# Altium PCB main_board.PcbDoc
Units mm, origin at the board's own origin, x right, y up, seen from the top; angles counter-clockwise.
Board outline 136.77 x 56.39 mm, 2 copper layers (Top Layer, Bottom Layer); 102 components, 85 nets, 405 pads, 40 vias.
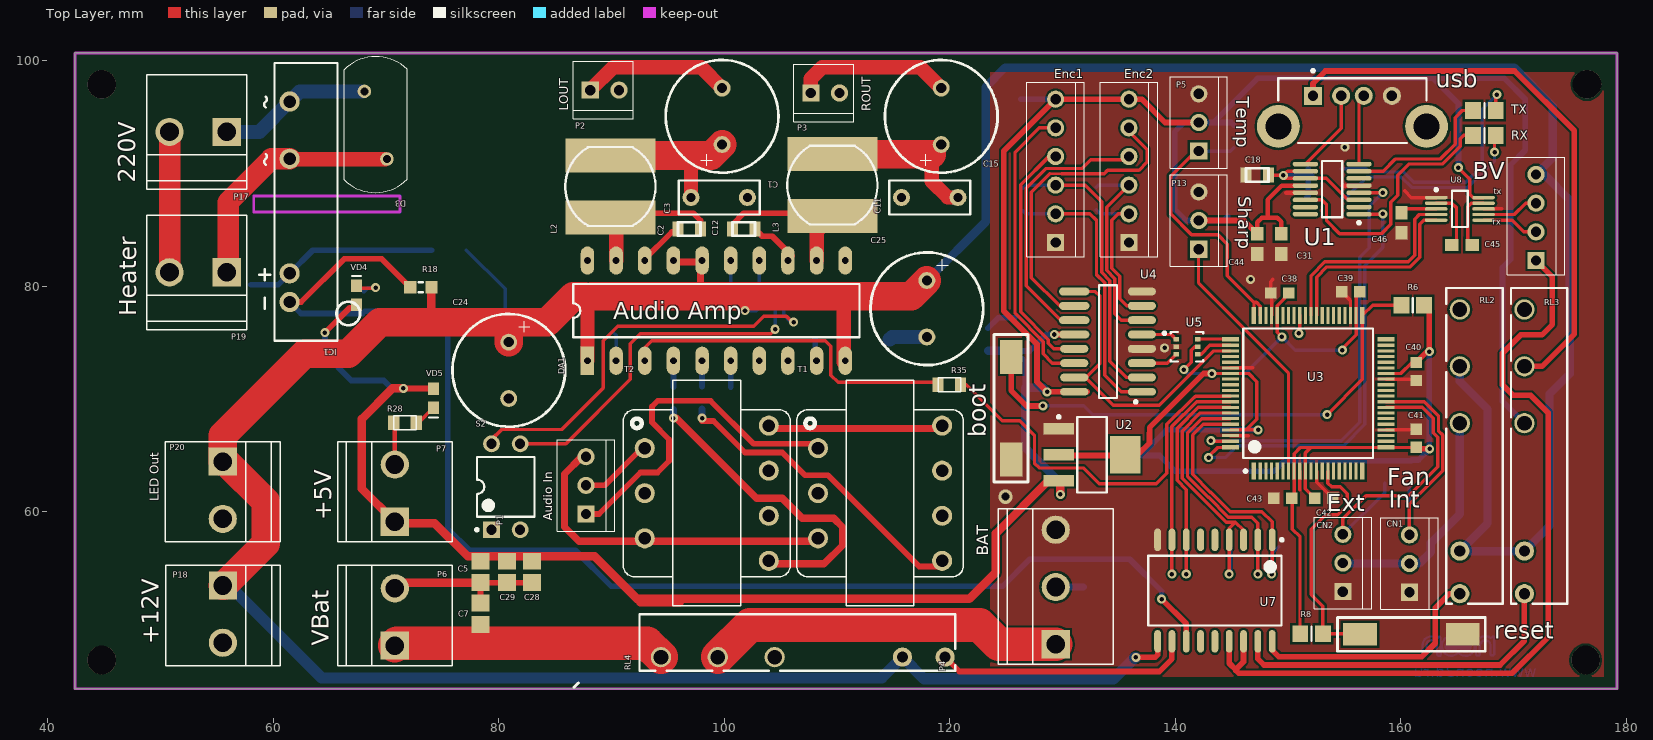
[diagram p0: Top Layer view]
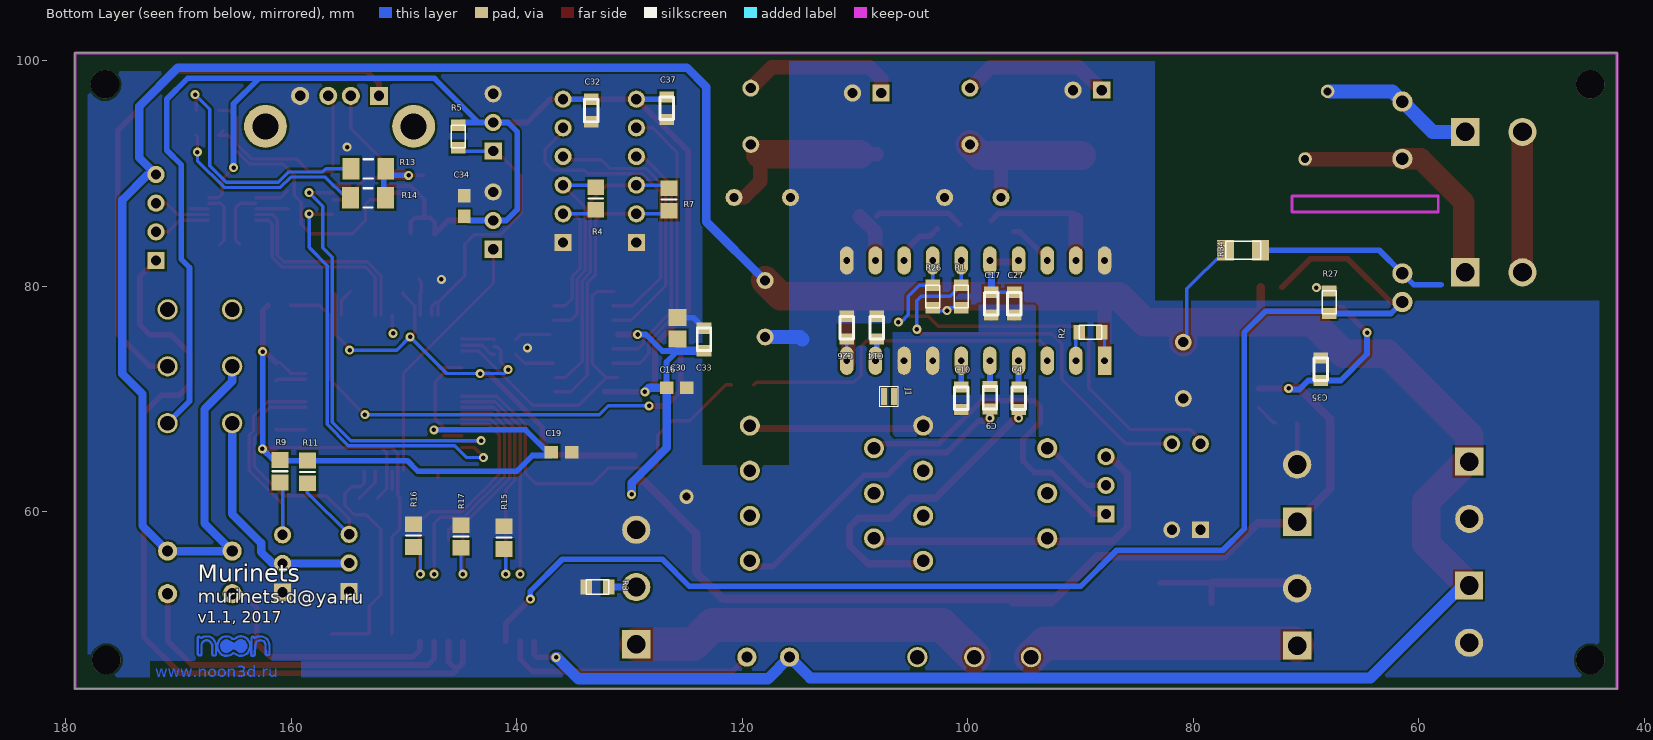
[diagram p1: Bottom Layer view, seen from below]

## Layer stack, top to bottom
Top Solder: solder mask 0.0102, Solder Resist, Dk 3.5
Top Layer: signal copper 0.0356
Dielectric 1: dielectric 0.32, FR-4, Dk 4.8
Bottom Layer: signal copper 0.0356
Bottom Solder: solder mask 0.0102, Solder Resist, Dk 3.5

## Board outline
42.425,44.323 42.425,100.711 179.197,100.711 179.197,44.323

## Design rules (kind name [scope] priority, off if disabled: settings)
Clearance Clearance_polygon [InPolygon] p1: gap=0.2 ignorepadtopadclearanceinfootprint=FALSE
Clearance [All] p2: gap=0.15 ignorepadtopadclearanceinfootprint=FALSE
PolygonConnect [IsPad And InNet('GND')] p1: connectstyle=Direct reliefconductorwidth=0.508 reliefentries=4 polygonreliefangle="90 Angle" airgapwidth=0.381
PolygonConnect ViaCon [IsVia And InNet('GND')] p2: connectstyle=Direct reliefconductorwidth=0.508 reliefentries=4 polygonreliefangle="90 Angle" airgapwidth=0.381
RoutingVias [All] p1: holewidth=0.6 width=1.15 viastyle="Through Hole" minholewidth=0.6 minwidth=1.15 maxholewidth=0.8 maxwidth=1.3 useviatemplates=TRUE viatemplateguid#1={5399A165-F482-44B8-8C10-10F574C55520} viatemplatename#1=v08h40
SolderMaskExpansion [All] p1: expansion=0.102
Width [All] p1: maxlimit=5.81 minlimit=0.2 preferedwidth=0.305 minimp=50.000000 maximp=50.000000 favimp=50.000000
30 further rules are at their usual default settings.

## Components (designator, comment, footprint, x,y, rotation, side; value= is the part's Value field where it differs from the comment)
boot "chip button" "BUTTON SMD" 125.45,67.65 r90 top
BV "wf-4" WF-4 172,82.3 r90 top
C1 "470. x 25V" CAP+_D10_dip 99.822,92.583 r180 top
C2 "0,22" Cap_0805 97.917,85.09 r180 top
C3 "0.68" CAPR500-300X720X650 99.568,87.884 r180 top
C4 "1u" Cap_0805 95.504,69.088 r90 bottom
C5 "10 мк" CAPC2012M 78.4,54.675 r270 top
C7 "10 мк" CAPC2012M 78.4,50.975 r90 top
C9 "1u" Cap_0805 98.044,71.12 r270 bottom
C10 "1u" Cap_0805 100.584,69.088 r90 bottom
C11 "0.68" CAPR500-300X720X650 118.237,87.884 r180 top
C12 "0,22" Cap_0805 102.743,85.09 r180 top
C14 "1u" Cap_0805 108.077,77.343 r270 bottom
C15 "470. x 25V" CAP+_D10_dip 119.253,92.583 r180 top
C16 "Cap" CAPC1608M 125.825,71 r180 bottom value=1uF
C17 "0.1" Cap_0805 97.917,77.47 r90 bottom
C18 "0.1" Cap_0805 148.275,89.875 r180 top
C19 "Cap" CAPC1608M 136.05,65.275 r180 bottom value=1uF
C24 "470. x 25V" CAP+_D10_dip 80.899,75.057 r0 top
C25 "470. x 25V" CAP+_D10_dip 117.983,80.518 r0 top
C26 "0.1" Cap_0805 110.744,77.343 r270 bottom
C27 "2.2" Cap_0805 95.885,77.47 r90 bottom
C28 "0.1" CAPC2012M 82.95,54.675 r90 top
C29 "0.1" CAPC2012M 80.75,54.675 r90 top
C30 "0.1" CAPC2012M 125.75,76.275 r270 bottom
C31 "0.1" CAPC1608M 149.425,83.775 r90 top
C32 "0.1" Cap_0805 133.4,94.6 r90 bottom
C33 "0.1" Cap_0805 123.4,76.3 r270 bottom
C34 "Cap" CAPC1608M 144.675,87.125 r90 bottom value=1uF
C35 "0.1" Cap_0805 68.707,73.66 r270 bottom
C37 "0.1" Cap_0805 126.7,94.8 r90 bottom
C38 "p" CAPC1608N 149.275,79.425 r0 top value=100nF
C39 "p" CAPC1608N 155.575,79.525 r0 top value=100nF
C40 "p" CAPC1608N 161.375,72.45 r90 top value=100nF
C41 "p" CAPC1608N 161.375,66.525 r270 top value=100nF
C42 "p" CAPC1608N 153.175,61.225 r180 top value=100nF
C43 "p" CAPC1608N 149.55,61.225 r0 top value=100nF
C44 "0.1" CAPC1608M 147.275,83.775 r90 top
C45 "0.1" CAPC1608M 165.45,83.675 r180 top
C46 "p" CAPC1608M 160.075,85.65 r270 top value=100nF
CN1 "3-pin" wf-3 160.775,52.885 r90 top
CN2 "3-pin" wf-3 154.875,52.935 r90 top
D3 "390V" Var_130 68.1,97.3 r270 top
DA1 "TPA3122D2" DIP20 87.884,73.406 r90 top
Enc1 "6-pin" WF-6 129.4,83.9 r90 top (schematic designator enc1)
Enc2 "6-pin" WF-6 135.9,83.9 r90 top (schematic designator enc2)
IC1 "S202T" CRYDOM_LC 61.468,87.503 r270 top
J1 "JMPSMD" JMPSMD 106.553,70.231 r270 bottom
L2 "22 мкГн" SDR0805 89.916,86.106 r90 top
L3 "22 мкГн" SDR0805 109.601,86.233 r90 top
P1 "WF-3" WF-3 87.757,59.817 r90 top
P2 "WF2" WF-2 88.138,97.409 r0 top
P3 "WF2" WF-2 107.696,97.155 r0 top
P4 "MPW3" "MPW-3 - duplicate" 129.413,48.26 r90 top
P5 "WF-3" WF-3 142.1,92 r90 top
P6 "MPW-2" MPW-2 70.8,48.145 r90 top
P7 "MPW-2" MPW-2 70.8,59.125 r90 top
P13 "WF-3" WF-3 142.1,83.3 r90 top
P17 "MPW-2" MPW-2 55.9,93.7 r180 top
P18 "MPW-2" MPW-2 55.55,53.479 r270 top
P19 "MPW-2" MPW-2 55.9,81.25 r180 top
P20 "MPW-2" MPW-2 55.538,64.459 r270 top
R1 "10k" Res_0805 100.584,78.105 r90 bottom
R2 "10k" Res_0805 88.138,75.946 r0 bottom
R3 "2k4" Res_0805 133.858,53.34 r180 bottom
R4 "100" RESC2012M 133,87.8 r90 bottom
R5 "10k" Res_0805 145.2,92.3 r90 bottom
R6 "510" RESC2012M 161.075,78.325 r0 top
R7 "100" RESC2012M 126.5,87.7 r90 bottom
R8 "510" RESC2012M 152.1,49.2 r180 top
R9 "100" RESC2012M 161,63.6 r90 bottom
R11 "100" RESC2012M 158.575,63.55 r90 bottom
R13 "Res2" RESC3216M 153.175,90.425 r0 bottom value=1K
R14 "Res2" RESC3216M 153.2,87.85 r0 bottom value=1K
R15 "10k" RESC2012M 141.15,57.725 r90 bottom
R16 "10k" RESC2012M 149.175,57.9 r90 bottom
R17 "10k" RESC2012M 144.95,57.825 r90 bottom
R18 "4.7K" RESC1608M 73.1,79.925 r0 top
R26 "10k" Res_0805 103.124,78.105 r90 bottom
R27 "510" Res_0805 67.945,77.597 r90 bottom
R28 "510" Res_0805 70.7,67.9 r0 top
R34 "510" Res_1206 74.05,83.2 r0 bottom
R35 "10k" Res_0805 120.975,71.275 r180 top
reset "chip button" "BUTTON SMD" 162.5,49.15 r180 top
RL2 "5VDC" REL_TYCO-SCHRACK_SNR 165.25,65.85 r90 top
RL3 "5VDC" REL_TYCO-SCHRACK_SNR 170.975,65.85 r90 top
RL4 "5VDC" REL_TYCO-SCHRACK_SNR 106.5,47.125 r180 top
RX "led" RESC2012M 167.425,93.4 r0 top
S2 "SW DIP-2" DIP-4 80.645,62.23 r90 top
T1 "TO-31" L2008-2014 108.331,65.659 r0 top
T2 "TO-31" L2008-2014 92.964,65.659 r0 top
TX "led" RESC2012M 167.425,95.6 r0 top
U1 "FT230X" SOP635P600-16N 153.925,88.625 r180 top
U2 "ADP3338" SOT223-4M 132.625,65.075 r0 top
U3 "LPC1758FBD80" SOT315-1_V 151.8,70.525 r90 top
U4 "SN65C1167" "SOIC127P600-16M - INCREASE WIDTH" 134.05,75.1 r180 top
U5 "NC7SZ157P6X" PSON65P220X250X80-7V 141.05,74.65 r0 top
U7 "ULN2803A" SOIC127P1030-18L 143.525,53.025 r270 top
U8 "ADM101E" TSSOP50P490-10AM 165.25,86.875 r0 top
usb "USBB-1J" USB2.5-2V4A 155.725,92.71 r270 top
VD4 "*" CD1608-0603 67.4,79.225 r90 top
VD5 "*" CD1608-0603 74.225,70.075 r270 top

## Footprints (in the part's own frame and the unit in brackets; to place one, negate y for a bottom-side part, rotate by r counter-clockwise, add the part's x,y. Pads: shape width x height; smd on the part's side, far side on the other; paste and mask are expansions set on the pad)
"BUTTON SMD" [mm]
  rect 3x2 smd: 1(6.1,0) 2(-3,0)
  silkscreen extent -5,-1.5 8.1,1.5, body extent -5,-1.5 8.1,1.5, height 5
CAP+_D10_dip [mm]
  round 1.5 hole 0.9: 1(0,0) 2(0,-5)
  silkscreen extent -5,-7.5 5,2.5
Cap_0805 [mm] "Type 0805"
  rect 1x1.3 smd: 1(0,0) 2(2,0)
  silkscreen extent 0,-0.6 2,0.6
CAPC1608M [mm] "Chip Capacitor, Body 1.6x0.8mm, IPC Low Density"
  rect 1.2x1.1 smd: 1(-0.9,0) 2(0.9,0)
  body extent -0.87,-0.48 0.87,0.48, height 0.85
CAPC1608N [mm] "Chip Capacitor, Body 1.6x0.8mm, IPC Medium Density"
  rect 1x1 smd: 1(-0.8,0) 2(0.8,0)
  body extent -0.87,-0.48 0.87,0.48, height 0.85
CAPC2012M [mm] "Chip Capacitor, Body 2.0x1.3mm, IPC Low Density"
  rect 1.5x1.6 smd: 1(-0.95,0) 2(0.95,0)
  body extent -1.1,-0.72 1.1,0.72, height 1.1
CAPR500-300X720X650 [mm] "Capacitor Radial, Pin spacing 5.0mm - Body With 3.0mm X Body Length 7.2mm X Body Height 6.5mm"
  round 1.5 hole 0.8: 1(-2.5,0) 2(2.5,0)
  silkscreen extent -3.6,-1.5 3.6,1.5, body extent -3.6,-1.5 3.6,1.5, height 6.5
CD1608-0603 [mm] "Chip Diode; Body 1.6 x 0.8 mm (LxW typ)"
  rect 1.1x1 smd: 1(-0.85,0) 2(0.85,0)
  silkscreen extent 1.7,-0.4 1.7,0.4
CRYDOM_LC [mm] "CRYDOM LC Serie, 4 Leads, Body 24.1mm x 5.1mm, Mini-SIP SSR (Solid State Relay)"
  round 1.8 hole 1.1: 1(-8.89,0) 2(-3.81,0) 3(6.35,0) 4(8.89,0)
  silkscreen extent -12.32,-2.7 12.32,4.25, body extent -12.31,-1.33 12.32,4.25, height 13.2
DIP20 [mm]
  rect 2.5x1.2 hole 0.6: 1(0,0)
  oval 2.5x1.2 hole 0.6: 2(0,-2.54) 3(0,-5.08) 4(0,-7.62) 5(0,-10.16) 6(0,-12.7) 7(0,-15.24) 8(0,-17.78) 9(0,-20.32) 10(0,-22.86) 11(8.89,-22.86) 12(8.89,-20.32) 13(8.89,-17.78) 14(8.89,-15.24) 15(8.89,-12.7) 16(8.89,-10.16) 17(8.89,-7.62) 18(8.89,-5.08) 19(8.89,-2.54) 20(8.89,0)
  silkscreen extent 2.08,-24.13 6.81,1.27
DIP-4 [mm] "DIP; 4 Leads; Row Spacing 7.62 mm; Pitch 2.54 mm"
  rect 1.5x1.5 hole 0.9: 1(-3.81,1.27)
  round 1.5 hole 0.9: 2(-3.81,-1.27) 3(3.81,-1.27) 4(3.81,1.27)
  silkscreen extent -3.93,-2.55 2.65,2.69, body extent -3.15,-2.5 3.15,2.5, height 5.6
JMPSMD [mil]
  rect 60x20 smd: 1(0,0) 2(0,-35)
  silkscreen extent -35,-50 35,15
L2008-2014 [mil]
  round 70 hole 44: 1(0,0) 2(0,-157.48) 3(0,-314.96) 4(433.07,-393.7) 5(433.07,-236.22) 6(433.07,-78.74) 7(433.07,78.74)
  silkscreen extent -75,-551 508,236
MPW-2 [mm]
  rect 2.5x2.5 hole 1.65: 1(0,0)
  round 2.5 hole 1.65: 2(5.08,0)
  silkscreen extent -1.78,-5.08 7.11,5.08
"MPW-3 - duplicate" [mm]
  rect 2.5x2.5 hole 1.65: 1(0,0)
  round 2.5 hole 1.65: 2(5.08,0) 3(10.16,0)
  silkscreen extent -1.78,-5.08 12,5.08
PSON65P220X250X80-7V [mm] "PSON, 6-Leads, Body 2.2x2.5 mm, Pitch 0.65mm, NSC Recommended (SC-70 Land)"
  rect 0.5x0.4 smd paste-0.125 mask+0.051: 1(-0.95,0.65) 2(-0.95,0) 3(-0.95,-0.65) 4(0.95,-0.65) 5(0.95,0) 6(0.95,0.65)
  silkscreen extent -2.12,-1.3 1.45,1.32
REL_TYCO-SCHRACK_SNR [mm] "5 Leads, Body 28.0 x 5mm, Slim PCB Relay SNR Serie"
  round 1.8 hole 1.3: 11(7.06,0) 12(2.02,0) 14(12.1,0)
  round 1.7 hole 1: A1(-13.1,0) A2(-9.32,0)
  silkscreen extent -14,-3.8 14,1.2, body extent -14,-3.8 14,1.2, height 15
Res_0805 [mm] "Type 0805"
  rect 1x1.3 smd: 1(0,0) 2(2,0)
  silkscreen extent 0,-0.63 2,0.63
Res_1206 [mm] "Type 1206"
  rect 1.5x1.8 smd: 1(0,0) 2(3.1,0)
  silkscreen extent 0,-0.8 3.1,0.8
RESC1608M [mm] "Chip Resistor, Body 1.6x0.8mm, IPC Low Density"
  rect 1.1x1.1 smd: 1(-0.95,0) 2(0.95,0)
  silkscreen extent -0.2,-0.45 0.2,0.45, body extent -0.85,-0.48 0.85,0.48, height 0.6
RESC2012M [mm] "Chip Resistor, Body 2.0x1.3mm, IPC Low Density"
  rect 1.4x1.5 smd: 1(-1,0) 2(1,0)
  silkscreen extent 0,-0.65 0,0.65, body extent -1.07,-0.7 1.07,0.7, height 0.65
RESC3216M [mm] "Chip Resistor, Body 3.2x1.6mm, IPC Low Density"
  rect 1.5x1.9 smd: 1(-1.55,0) 2(1.55,0)
  silkscreen extent -0.4,-0.85 0.4,0.85, body extent -1.68,-0.87 1.68,0.87, height 0.71
SDR0805 [mm] "SDR 0805 series"
  rect 3x8 smd: 1(0,0) 2(5.5,0)
  silkscreen extent -0.75,-4 6.25,4
"SOIC127P600-16M - INCREASE WIDTH" [mm] "SOIC, 16-Leads, Body 9.9x3.9mm, Pitch 1.27mm, IPC Low Density"
  oval 2.5x0.7 smd: 1(-3,4.445) 2(-3,3.175) 3(-3,1.905) 4(-3,0.635) 5(-3,-0.635) 6(-3,-1.905) 7(-3,-3.175) 8(-3,-4.445) 13(3,0.635) 14(3,1.905) 15(3,3.175) 16(3,4.445)
  oval 2.7x0.7 smd: 9(3,-4.445) 10(3,-3.175) 11(3,-1.905) 12(3,-0.635)
  silkscreen extent -2.58,-5 0.8,5.47, body extent -2,-5 2,5, height 1.75
SOIC127P1030-18L [mm] "SOIC, 18-Leads, Body 11.6x7.5mm, Pitch 1.27mm, IPC High Density"
  oval 2x0.6 smd: 1(-4.5,5.08) 2(-4.5,3.81) 3(-4.5,2.54) 4(-4.5,1.27) 5(-4.5,0) 6(-4.5,-1.27) 7(-4.5,-2.54) 8(-4.5,-3.81) 9(-4.5,-5.08) 10(4.5,-5.08) 11(4.5,-3.81) 12(4.5,-2.54) 13(4.5,-1.27) 14(4.5,0) 15(4.5,1.27) 16(4.5,2.54) 17(4.5,3.81) 18(4.5,5.08)
  silkscreen extent -4.62,-5.9 3.1,6.06, body extent -3.8,-5.95 3.8,5.95, height 2.65
SOP635P600-16N [mm] "SOP, 16-Leads, Body 4.9x3.9mm, Pitch 0.635mm, IPC Medium Density"
  oval 2.25x0.4 smd: 1(-2.375,2.222) 2(-2.375,1.587) 3(-2.375,0.952) 4(-2.375,0.317) 5(-2.375,-0.318) 6(-2.375,-0.953) 7(-2.375,-1.588) 8(-2.375,-2.223) 9(2.375,-2.222) 10(2.375,-1.587) 11(2.375,-0.952) 12(2.375,-0.317) 13(2.375,0.318) 14(2.375,0.953) 15(2.375,1.588) 16(2.375,2.223)
  silkscreen extent -2.5,-2.5 0.9,3.1, body extent -1.99,-2.5 1.99,2.5, height 1.76
SOT223-4M [mm] "SOT223, 4-Leads, Body 6.5x3.5mm, Pitch 2.3mm, Lead Span 7mm, IPC Low Density"
  rect 2.7x1 smd: 1(-2.95,2.3) 2(-2.95,0) 3(-2.95,-2.3)
  rect 2.7x3.3 smd: 4(2.95,0)
  silkscreen extent -3.07,-3.35 1.3,3.47, body extent -1.85,-3.35 1.85,3.35, height 1.8
SOT315-1_V [mm] "Thin QFP, 80-Leads, Body 12x12mm, Pitch 0.5mm, NXP Recommended"
  rect 1.5x0.4 smd: 1(-6.9,4.81) 20(-6.9,-4.81) 41(6.9,-4.81) 60(6.9,4.81)
  rect 1.5x0.28 smd: 2(-6.9,4.25) 3(-6.9,3.75) 4(-6.9,3.25) 5(-6.9,2.75) 6(-6.9,2.25) 7(-6.9,1.75) 8(-6.9,1.25) 9(-6.9,0.75) 10(-6.9,0.25) 11(-6.9,-0.25) 12(-6.9,-0.75) 13(-6.9,-1.25) 14(-6.9,-1.75) 15(-6.9,-2.25) 16(-6.9,-2.75) 17(-6.9,-3.25) 18(-6.9,-3.75) 19(-6.9,-4.25) 42(6.9,-4.25) 43(6.9,-3.75) 44(6.9,-3.25) 45(6.9,-2.75) 46(6.9,-2.25) 47(6.9,-1.75) 48(6.9,-1.25) 49(6.9,-0.75) 50(6.9,-0.25) 51(6.9,0.25) 52(6.9,0.75) 53(6.9,1.25) 54(6.9,1.75) 55(6.9,2.25) 56(6.9,2.75) 57(6.9,3.25) 58(6.9,3.75) 59(6.9,4.25)
  rect 0.4x1.5 smd: 21(-4.81,-6.9) 40(4.81,-6.9) 61(4.81,6.9) 80(-4.81,6.9)
  rect 0.28x1.5 smd: 22(-4.25,-6.9) 23(-3.75,-6.9) 24(-3.25,-6.9) 25(-2.75,-6.9) 26(-2.25,-6.9) 27(-1.75,-6.9) 28(-1.25,-6.9) 29(-0.75,-6.9) 30(-0.25,-6.9) 31(0.25,-6.9) 32(0.75,-6.9) 33(1.25,-6.9) 34(1.75,-6.9) 35(2.25,-6.9) 36(2.75,-6.9) 37(3.25,-6.9) 38(3.75,-6.9) 39(4.25,-6.9) 62(4.25,6.9) 63(3.75,6.9) 64(3.25,6.9) 65(2.75,6.9) 66(2.25,6.9) 67(1.75,6.9) 68(1.25,6.9) 69(0.75,6.9) 70(0.25,6.9) 71(-0.25,6.9) 72(-0.75,6.9) 73(-1.25,6.9) 74(-1.75,6.9) 75(-2.25,6.9) 76(-2.75,6.9) 77(-3.25,6.9) 78(-3.75,6.9) 79(-4.25,6.9)
  silkscreen extent -7.02,-5.75 5.75,5.75, body extent -6,-6 6,6, height 1.6
TSSOP50P490-10AM [mm] "TSSOP, 10-Leads, Body 3x3mm, Pitch 0.5mm, IPC Low Density"
  oval 2x0.3 smd: 1(-2.1,1) 2(-2.1,0.5) 3(-2.1,0) 4(-2.1,-0.5) 5(-2.1,-1) 6(2.1,-1) 7(2.1,-0.5) 8(2.1,0) 9(2.1,0.5) 10(2.1,1)
  silkscreen extent -2.22,-1.6 0.7,1.82, body extent -1.6,-1.6 1.6,1.6, height 1.1
USB2.5-2V4A [mm] "Connector; USB1.1, Type A, Thru-Hole; 4 Position; Vertical"
  rect 1.6x1.6 hole 0.92: 1(-4.19,-3.5)
  round 1.6 hole 0.92: 2(-4.19,-1) 3(-4.19,1) 4(-4.19,3.5)
  round 3.8 hole 2.3: 5(-1.48,6.57) 6(-1.48,-6.57)
  silkscreen extent -6.53,-6.57 0,6.57, body extent -5.76,-6.57 0,6.57, height 15
Var_130 [mm]
  round 1.2 hole 0.7: 1(0,0) 2(6,2)
  silkscreen extent -3.08,-1.8 8.98,3.8
WF-2 [mil]
  rect 60x60 hole 36: 1(0,0)
  round 60 hole 36: 2(100,0)
  silkscreen extent -60,-100 150,100, body extent -60,-100 150,100, height 394
wf-3 [mil]
  rect 60x60 hole 36: 1(0,0)
  round 60 hole 36: 2(100,0) 3(200,0)
  silkscreen extent -60,-100 260,100, body extent -60,-100 260,100, height 394
WF-3 [mil]
  rect 60x60 hole 36: 1(0,0)
  round 60 hole 36: 2(100,0) 3(200,0)
  silkscreen extent -60,-100 260,100, body extent -60,-100 260,100, height 394
WF-4 [mil]
  rect 60x60 hole 36: 1(0,0)
  round 60 hole 36: 2(100,0) 3(200,0) 4(300,0)
  silkscreen extent -50,-100 360,100, body extent -50,-100 360,100, height 394
WF-6 [mil]
  rect 60x60 hole 36: 1(0,0)
  round 60 hole 36: 2(100,0) 3(200,0) 4(300,0) 5(400,0) 6(500,0)
  silkscreen extent -50,-100 560,100, body extent -50,-100 560,100, height 394

## Part data
BV: library part 4-pin
C1 C15 C24 C25: library part Cap+, "Tantalum and aluminium electrolytic capacitors", ValueSCH="470. x 25V"
C2 C4 C5 C7 C9 C10 C12 C14 C17 C18 C26 C27 C28 C29 C30 C31 C32 C33 C35 C37 C44 C45: library part Cap, "Ceramic capacitors"
  C2 C12: ValueSCH=0,22
  C4 C9 C10 C14: ValueSCH=1u
  C5 C7: ValueSCH="10 мк"
  C17 C18 C26 C28 C29 C30 C31 C32 C33 C35 C37 C44 C45: ValueSCH=0.1
  C27: ValueSCH=2.2
C3 C11: library part CPER_10NF_400V_10%_500-300X720X650, "Non-polarised capacitor", Case="LS5 W3 x L7.2 x H6.5", Manufacturer=EPCOS, Manufacturer Part Number=B32529C6103K000, Tolerance=±10%, Voltage=400VDC/200VAC, Author="CERN DEM JLC", ComponentHeight=6.5mm, Component Type=Standard, CreateDate=23.03.2009, HelpURL=\\cern.ch\dfs\Applications\Altium\Datasheets\CPER_EPCOS_B32529.pdf, LatestRevisionDate=23.03.2009, Mounted=Yes, Part Description="Metallized Polyester Film Capacitor (MKT)", Part Number=CPER_10NF_400V_10%_500-300X720X650, Pin Count=2, SMD=No, Socket=No, Status=None, Table="Capacitors THD"
C16 C19 C34: "Capacitor", LatestRevisionDate=17-Jul-2002, LatestRevisionNote="Re-released for DXP Platform.", PackageDescription="Radial Cap, Thru-Hole; 2 Leads; 0.3 in Pin Spacing", PackageReference=RAD-0.3, Published=8-Jun-2000, Publisher="Altium Limited"
C38 C39 C40 C41 C42 C43 C46: library part Cap, "Capacitor", LatestRevisionDate=17-Jul-2002, LatestRevisionNote="Re-released for DXP Platform.", PackageDescription="Radial Cap, Thru-Hole; 2 Leads; 0.3 in Pin Spacing", PackageReference=RAD-0.3, Published=8-Jun-2000, Publisher="Altium Limited"
D3: library part "Varistor 430V", "Varistor", Device=390V
IC1: library part LC242, "Opto Relay x1 Type1", Manufacturer=CRYDOM, Author="CERN DEM JLC", ComponentHeight=12.7mm, Component Type=Standard, CreateDate=12.03.2014, Device=S202T, HelpURL=\\cern.ch\dfs\Applications\Altium\Datasheets\LC242.pdf, LatestRevisionDate=12.03.2014, Manufacturer Part Number=LC242, Mounted=Yes, PackageDescription="CRYDOM LC Serie, 4 Leads, Body 24.1mm x 5.1mm, Mini-SIP SSR (Solid State Relay)", Part Description="4-10VDC Control Voltage, 12-280VAC Operating Voltage, 2A Operating Current, Mini-SIP Solid State Relay(SSR), LC Serie", Part Number=LC242, Pin Count=4, SMD=No, Socket=No, Table=Optocouplers
L2 L3: library part Ind, "Coils", ValueSCH="22 мкГн"
R1 R2 R3 R4 R5 R6 R7 R8 R9 R11 R26 R27 R28 R34 R35: library part Res, "Ceramic resisors"
  R1 R2 R5 R26 R35: ValueSCH=10k
  R3: ValueSCH=2k4
  R4 R7 R9 R11: ValueSCH=100
  R6 R8 R27 R28 R34: ValueSCH=510
R13 R14: "Resistor", LatestRevisionDate=17-Jul-2002, LatestRevisionNote="Re-released for DXP Platform.", PackageDescription="Axial Device, Thru-Hole; 2 Leads; 0.4 in Pin Spacing", PackageReference=AXIAL-0.4, Published=8-Jun-2000, Publisher="Altium Limited"
R15 R16 R17 R18: library part Res, "Ceramic resisors", ValueSCH=510
RL2 RL3 RL4: library part REL_TYCO-SCHRACK_V23092-A1005-A301, "SNR Slim PCB Relay Form C (1 CO Contact)", Manufacturer="TYCO SCHRACK", Manufacturer Part Number="V23092-A1005-A301 or 0-1393236-2", Author="CERN DEM JLC", ComponentHeight=15mm, Component Type=Standard, CreateDate=28.01.2009, HelpURL=\\cern.ch\dfs\Applications\Altium\Datasheets\REL_TYCO-SCHRACK_SNR.pdf, LatestRevisionDate=28.01.2009, Mounted=Yes, PackageDescription="5 Leads, Body 28.0 x 5mm, Slim PCB Relay SNR Serie", Part Description="SPDT General Purpose  Slim PCB Relay, SNR Serie", Part Number=REL_TYCO-SCHRACK_V23092-A1005-A301, Pin Count=5, SMD=No, Socket=No, Status=None, Table=Relays
RX TX: library part "chip led", "chip led"
S2: "DIP Switch, 2 Position, SPST", LatestRevisionDate=17-Jul-2002, LatestRevisionNote="Re-released for DXP Platform.", PackageReference=DIP-4, Published=24-Mar-1999, Publisher="Altium Limited"
U2: library part ADP3339, "ADP3339AKCZ-3.3-R7"
U3: "32-bit ARM Cortex-M3 MCU, 512 kB Flash, 64 kB SRAM, 100 MHz, USB 2.0 Device/Host/OTG, Ethernet, CAN, 12-Bit ADC, DAC, I2S, 80-Pin LQFP", ADC channels=6, CAN=2, Code_IEC=136E15, Code_JEDEC=MS-026, ComponentLink1Description="Manufacturer URL", ComponentLink1URL=http://www.nxp.com/, ComponentLink2Description=Datasheet, ComponentLink2URL=http://www.nxp.com/documents/data_sheet/LPC1759_58_56_54_52_51.pdf, DatasheetVersion="Rev. 7, Mar-2011", Flash="512 kB", fmax="100 MHz", GPIOs=52, PackageDescription="LQFP80: Plastic Low Profile Quad Flat Package; 80 Leads; Body 12 x 12 x 1.4 mm", PackageReference=SOT315-1, PackageVersion=Feb-2003, PartNumber=LPC1758FBD80, PLL=Y, PWM=6, SPI=1, SRAM="64 kB", SSP=2, Timers=4, UART=4, USB=1, VDD (max)="3.6 V", VDD (min)="2.4 V", VDD (typ)="3.3 V"
U4: "RS-422 Dual Differential Drivers and Receivers"
U5: library part NC7SZ157
U7: "EIGHT DARLINGTON ARRAYS"
U8: "Tiny RS-232 Transceiver"
VD4 VD5: library part LED, "LED"
DA1: ValueSCH=TPA3122D2
usb: url=http://www.brownbear.ru/components/usbb-1j.html

## Free pads (board coordinates)
  round 2.524 hole 2.54 unplated: 0(44.805,46.863) 0(44.805,97.917) 0(176.403,46.863) 0(176.53,97.917)

## Via types
v1: diameter 0.8, hole 0.4, Top Layer to Bottom Layer, 39 vias
v2: diameter 1.27, hole 0.711, Top Layer to Bottom Layer, 1 vias

## Nets (pads, with @x,y where several pads share a name; then routed paths per layer and width w, separated by ;. In a path a pad name is that pad's centre, name@x,y a point inside that pad or via, vN(x,y) a via of type N, cw(c..) or ccw(c..) an arc to the next point about the centre after c; other vN are vias at no path point)
3V3_FTDI: C18.1 R13.1 R14.1 U1.3 U1.10 U1.11 | length 16.1
  Top Layer w0.3: C18.1@148.275,89.825 148.3,89.85 v1(149.6,89.85) 149.962,90.212 U1.10 ; v1@149.6,89.577 U1.11 153.396,89.577 155.301,87.672 U1.3
  Bottom Layer w0.5: v1(149.6,89.85) R13.1@151.8,89.85 ; R14.1 151.8,88 R13.1@151.8,89.85 ; R13.1@151.8,90.425 R13.1@151.8,89.85 ; R13.1@152.125,89.85 R13.1@151.8,89.85
+3.3: C19.1 C38.2 C39.2 C40.2 C41.2 C42.2 C43.2 R6.2 R8.2 R9.2 R11.2 U2.2 U2.4 U3.8 U3.10 U3.21 U3.34 U3.42 U3.56 U3.67 U3.77 U5.5 | length 147.5
  Top Layer w0.3: v1(140.775,72.625) 141.425,73.275 141.425,74.325 141.75,74.65 U5.5 ; v1(143.25,72.275) U3.67 146.525,72.275 147.25,71.55 147.25,68.2 146.325,67.275 ; U3.77 146.325,67.275 ; v1(147.35,67.275) 146.325,67.275 ; v1(149.475,75.525) 149.05,75.95 U3.56 149.05,78.3 150.075,79.325 C38.2 ; C43.2 150.55,61.425 U3.8 150.55,65.15 151.115,65.715 152.04,65.715 ; C43.2@150.4,61.225 150.4,58.475 151.075,57.8 151.075,49.225 R8.2 ; C42.2 151.55,62.05 U3.10 151.55,65.225 152.04,65.715 ; v1(154.825,74.35) 154.825,74.475 156.05,75.7 U3.42 156.05,79.2 C39.2 ; U3.34 160.025,72.275 161,73.25 C40.2 ; C41.2@161.365,65.715 U3.21 152.04,65.715
  Top Layer w0.5: U2.2@129.55,65 U2.4@135.575,65 ; U2.4 136.675,65.075 137.725,66.125 137.725,67.001 137.737,67.013 137.737,67.488 142.525,72.275 v1(143.25,72.275) ; C41.2 161.502,65.598 v1(162.575,65.598) ; C40.2 162.35,74.225 v1(162.55,74.225) 162.55,77.85 R6.2
  Bottom Layer w0.3: v1(140.775,72.625) 141.125,72.275 v1(143.25,72.275) 146.225,72.275 v1(149.475,75.525) 150.65,74.35 v1(154.825,74.35)
  Bottom Layer w0.5: v1(147.35,67.275) 139.225,67.275 136.95,65 138.625,65 140.025,63.6 148.775,63.6 149.725,64.55 R11.2 160.95,64.55 R9.2 161.577,64.6 v1(162.575,65.598) 162.55,65.624 v1(162.55,74.225)
+5: C5.1 C16.1 C28.2 C29.2 C30.2 C31.2 C32.2 C33.2 C34.1 C35.2 C37.2 C44.2 Enc1.6 Enc2.6 P5.2 P7.1 P13.2 R5.2 RL3.12 U1.12 U2.3 U4.12 U4.16 U8.10 VD4.1 VD5.1 | length 288.7
  Top Layer w0.3: C31.2 C31.2@149.425,85 ; v1(165.125,90.525) 166.137,89.513 166.137,88.187 166.45,87.875 U8.10
  Top Layer w0.4: C44.2 147.275,85.675 147.7,86.1 148.15,86.1 ; C31.2@149.425,85 149.425,85.725 149.05,86.1 148.15,86.1 ; U1.12 149.467,88.942 148.225,87.7 148.225,86.175 148.15,86.1
  Top Layer w0.5: v1(129.291,75.735) U4.12 ; U4.16@132.22,70.655 U4.16 v1(128.645,70.655) 127.75,71.55 127.75,74.872 124.8,77.822 124.8,92 Enc1.6 Enc2.6 137.05,96.6 139.11,94.54 P5.2 ; P13.2 146.11,85.84 C44.2
  Top Layer w0.508: v1(64.6,75.9) 66.805,78.105 VD4.1@67.31,78.105 ; v1(71.55,70.95) 74.2,70.95 VD5.1
  Top Layer w0.75: v1(71.55,70.95) 70.575,70.95 67.875,68.25 67.875,62.05 P7.1 70.925,59 74.331,59 77.281,56.05 88.525,56.05 92.275,52.3 ; 96.05,52 92.575,52 92.275,52.3 ; v1(129.825,61.55) 129.825,62.625 U2.3 128.775,62.775 124.1,58.1 124.1,54.65 121.75,52.3 92.275,52.3
  Bottom Layer w0.3: R5.2 R5.2@145.275,94.3
  Bottom Layer w0.5: C37.2@126.3,96.6 Enc1.6 ; C16.1 126.725,73.3 125.75,74.275 127.1,74.275 128.56,75.735 v1(129.291,75.735) ; C32.2 Enc2.6 ; C34.1 144.29,85.84 P13.2 140.935,85.84 139.975,86.8 139.975,93.725 140.79,94.54 P5.2 143.39,94.54 ; R5.2 144.96,94.54 143.39,94.54 ; v1(165.125,90.525) 165.125,96.2 162.875,98.45 ; RL3.12 169.025,69.82 169.025,81.675 169.75,82.4 169.75,90.775 171.05,92.075 171.05,96.6 169.2,98.45 162.875,98.45 ; 143.39,94.54 147.3,98.45 162.875,98.45
  Bottom Layer w0.508: v1(64.6,75.9) 64.6,74 66.94,71.66 C35.2 69.818,71.66 70.612,70.866 71.466,70.866 v1(71.55,70.95)
  Bottom Layer w0.75: C33.2@123.425,74.275 125.75,74.275 ; v1(128.645,70.655) 128.3,71 C16.1 126.725,65.675 129.825,62.575 v1(129.825,61.55)
+12: BV.4 C17.2 C24.1 C25.1 C26.2 C27.2 DA1.1 DA1.10 DA1.16 DA1.17 P18.1 P20.1 R1.1 R2.1 R18.2 R26.1 R34.2 RL2.11 RL2.A2 RL3.A2 RL4.A2 U7.10 | length 358
  Top Layer w0.5: v1(136.525,47.1) 138.225,47.1 138.445,47.32 U7.10
  Top Layer w0.635: DA1.17@95.377,82.169 97.917,82.169 97.917,79.121
  Top Layer w0.75: R18.2 74.05,77.906 75.12,76.835
  Top Layer w1.27: 87.63,79.121 87.884,78.867 DA1.1 ; DA1.10@110.617,73.279 110.617,79.121
  Top Layer w2.54: P18.1 55.627,53.479 59.348,57.2 59.348,60.925 55.814,64.459 P20.1 55.538,66.781 62.787,74.03 66.664,74.03 69.469,76.835 75.12,76.835 80.772,76.835 ; C24.1 80.899,76.708 80.772,76.835 ; 87.63,79.121 86.614,79.121 84.328,76.835 80.772,76.835 ; 88.265,79.121 97.917,79.121 110.617,79.121 116.586,79.121 C25.1
  Bottom Layer w0.305: R34.2 80.575,79.775 80.575,75.381 C24.1 ; DA1.1 87.884,75.692 R2.1 ; C27.2 C17.2 ; R1.1 101.6,78.105 v1(101.854,77.851) 102.87,77.851 R26.1 ; DA1.10 C26.2
  Bottom Layer w0.635: C17.2 DA1.16@97.917,82.169
  Bottom Layer w0.75: C25.1 123.2,85.735 123.2,97.675 124.925,99.4 170.075,99.4 173.475,96 173.475,91.395 BV.4 172.73,89.92 174.982,87.668 174.982,72.243 173.2,70.46 173.2,58.755 RL3.A2 RL2.A2 167.7,58.98 167.7,69.125 165.25,71.575 RL2.11
  Bottom Layer w1: P18.1@55.538,54.053 64.316,45.275 113.97,45.275 RL4.A2 117.745,45.2 134.525,45.2 136.425,47.1 v1(136.525,47.1)
AGND: C10.1 C17.1 C27.1 DA1.7 DA1.8 J1.1 T1.7 T2.7 | length 15.4
  Top Layer w0.635: T2.7@103.964,67.405 T1.7@119.331,67.405
bat_pwr: U3.72 U7.8 | length 19.2
  Top Layer w0.3: v1(139.715,54.475) U7.8 139.715,67.576 141.914,69.775 U3.72
bat_pwr_gnd: RL4.A1 U7.11 | length 22.7
  Top Layer w0.5: RL4.A1 120.875,45.85 138.6,45.85 139.715,46.965 U7.11
boot: boot.1 R6.1 U3.41 | length 45.8
  Top Layer w0.3: v1(153.475,68.625) 156.61,71.76 U3.41 157.51,78.325 R6.1
  Top Layer w0.5: boot.1 125.45,70.775 126.825,69.4 v1(128.275,69.4)
  Bottom Layer w0.3: v1(128.275,69.4) 131.9,69.4 132.675,68.625 v1(153.475,68.625)
BV_gnd: BV.1 U7.15 U7.16 | length 74.3
  Top Layer w0.5: U7.15 144.795,46.58 145.4,45.975 ; U7.16 146.065,46.71 145.4,46.045 145.4,45.975 ; BV.1 173.45,80.85 173.45,76.625 172.525,75.7 170.65,75.7 169.025,74.075 169.025,71.275 169.95,70.35 171.525,70.35 173.075,68.8 173.075,48.875 169.9,45.7 145.625,45.7 145.4,45.925 145.4,45.975
BV_pwr: R17.1 U3.74 U7.3 U7.4 | length 24.6
  Top Layer w0.3: v1(144.795,54.475) U7.4 144.795,58.545 145.337,59.088 ; U3.74 142.227,68.775 140.625,67.173 140.625,62.977 142.752,60.85 142.777,60.85 144.54,59.088 145.337,59.088 ; U7.3 146.065,58.36 145.337,59.088
  Bottom Layer w0.3: v1(144.795,54.475) 144.95,54.63 R17.1
bv_rs232_rx: BV.2 U8.6 | length 5.1
  Top Layer w0.3: U8.6 169.875,85.875 170.91,84.84 BV.2
bv_rs232_tx: BV.3 U8.7 | length 5.1
  Top Layer w0.3: U8.7 170.075,86.375 171.08,87.38 BV.3
bv_uart_rx: U3.49 U8.5 | length 17.8
  Top Layer w0.3: U3.49 152.55,80.814 153.461,81.725 160.85,81.725 161.7,82.575 161.7,85.525 162.05,85.875 U8.5
bv_uart_tx: U3.50 U8.4 | length 18.8
  Top Layer w0.3: U3.50 152.05,80.95 153.275,82.175 160.664,82.175 161.25,82.761 161.25,85.975 161.65,86.375 U8.4
enc1_data: U4.3 U5.3 | length 3.7
  Top Layer w0.3: U4.3@136.75,73.195 U4.3 139.32,73.195 U5.3@140.1,73.975
enc1in_N: Enc1.2 R7.1 U4.1 | length 24.4
  Top Layer w0.3: Enc1.2 132.435,86.44 133.025,85.85 133.025,81.05 133.75,80.325 133.75,72.13 135.225,70.655 U4.1@136.6,70.655
  Bottom Layer w0.3: R7.1 126.76,86.44 Enc1.2
enc1in_P: Enc1.3 R7.2 U4.2 | length 25.1
  Top Layer w0.3: Enc1.3 132.02,88.98 133.475,87.525 133.475,81.236 134.2,80.511 134.2,73.375 135.65,71.925 U4.2@136.6,71.925
  Bottom Layer w0.3: R7.2 126.78,88.98 Enc1.3
enc1out_N: Enc1.4 U4.13 | length 22.2
  Top Layer w0.3: Enc1.4 128.813,91.52 126.3,89.007 126.3,77.736 128.75,75.286 128.75,74.95 129.235,74.465 U4.13 U4.13@131.5,74.465
enc1out_P: Enc1.5 U4.14 | length 27
  Top Layer w0.3: Enc1.5 127.96,94.06 125.8,91.9 125.8,77.6 128.3,75.1 128.3,74.009 129.114,73.195 U4.14 U4.14@131.5,73.195
enc2_data: U4.5 U5.1 | length 3.2
  Top Layer w0.3: U4.5 139.64,75.735 U5.1@140.1,75.275
enc2_sck: U3.63 U4.9 U4.15 | length 26.8
  Top Layer w0.3: U4.15 U4.15@132.016,71.925 ; U4.9@131.35,79.545 132.93,79.545 133.3,79.175 133.3,73.125 132.1,71.925 U4.15@132.016,71.925 ; U3.63 143.425,74.275 138.6,69.45 134.491,69.45 U4.15@132.016,71.925
enc2in_N: Enc2.2 R4.1 U4.7 | length 14
  Top Layer w0.3: Enc2.2 134.965,86.44 134.375,85.85 134.375,81.609 135.1,80.884 135.1,78.9 135.725,78.275 U4.7@136.75,78.275
  Bottom Layer w0.3: R4.1 133.36,86.44 Enc2.2
enc2in_P: Enc2.3 R4.2 U4.6 | length 17.7
  Top Layer w0.3: Enc2.3@135.9,88.68 135.58,88.68 133.925,87.025 133.925,81.423 134.65,80.698 134.65,77.58 135.225,77.005 U4.6@136.75,77.005
  Bottom Layer w0.3: R4.2 133.18,88.98 Enc2.3
enc2out_N: Enc2.4 U4.11 | length 24.7
  Top Layer w0.3: U4.11@131.5,77.005 U4.11 129.87,77.005 126.8,80.075 126.8,88.7 128.558,90.458 131.758,90.458 132.52,91.22 Enc2.4@135.9,91.22
enc2out_P: Enc2.5 U4.10 | length 27.6
  Top Layer w0.2: 128.883,89.991 128.892,90 129.925,90
  Top Layer w0.3: 128.883,89.991 127.25,88.358 127.25,80.775 129.75,78.275 U4.10 U4.10@131.5,78.275 ; 129.925,90 133.7,90 134,90.3 136.8,90.3 137.5,91 137.5,92.16 Enc2.5@135.9,93.76
enc_data: U3.62 U5.4 | length 3.2
  Top Layer w0.3: U5.4 142.3,74 143.075,74.775 U3.62
enc_select: U3.61 U5.6 | length 2.9
  Top Layer w0.3: U5.6@142,75.275 142.06,75.335 U3.61
Fan: R16.1 U3.76 U7.1 | length 23.4
  Top Layer w0.3: U3.76 142.5,67.775 141.55,66.825 141.55,63.325 143.125,61.75 143.15,61.75 144.875,60.025 147.7,60.025 148.605,59.12 U7.1 148.605,54.53 v1(148.55,54.475)
  Bottom Layer w0.3: v1(148.55,54.475) 148.55,56.275 R16.1
Fan_12V: CN1.2 CN2.2 RL2.12 | length 20.7
  Bottom Layer w0.75: CN2.2 154.925,55.425 CN1.2 161.65,55.425 162.675,56.45 162.675,57.25 165.25,59.825 RL2.12
Fan_ctrl_gnd: RL2.A1 U7.18 | length 21.2
  Top Layer w0.5: U7.18 148.605,47.745 149.2,47.15 161.863,47.15 163.063,48.35 163.063,51.488 164.325,52.75 RL2.A1@164.6,52.75
FT_CTS: U1.6
FT_RTS: U1.2
FT_RX: U1.4 U3.79 | length 39
  Top Layer w0.3: v1(143.175,66.325) 143.225,66.275 U3.79 ; U1.4 158.407,88.307 v1(158.425,88.325)
  Bottom Layer w0.3: v1(143.175,66.325) 154.75,66.325 156.375,67.95 156.375,82.575 157.225,83.425 157.225,87.125 v1(158.425,88.325)
FT_RxLed: RX.1 U1.14 | length 23.7
  Top Layer w0.3: U1.14 153.001,87.672 153.425,87.248 153.425,85.825 154.575,84.675 158.3,84.675 159.125,85.5 159.125,87.475 159.725,88.075 159.725,89.875 160.7,90.85 163.686,90.85 165.275,92.439 165.275,93.1 165.575,93.4 RX.1 RX.1@166.025,93.8
FT_TX: U1.1 U3.80 | length 38.9
  Top Layer w0.3: v1(142.975,64.825) 142.975,64.925 143.765,65.715 U3.80 ; U1.1 158.402,86.402 v1(158.425,86.425)
  Bottom Layer w0.3: v1(142.975,64.825) 144.45,64.825 145.5,65.875 154.936,65.875 156.825,67.764 156.825,81.85 158.425,83.45 v1(158.425,86.425)
FT_TxLed: TX.1 U1.7 | length 13.7
  Top Layer w0.3: U1.7 158.45,90.212 159.538,91.3 163.5,91.3 164.825,92.625 164.825,94.975 165.45,95.6 TX.1
G0: DA1.14 R26.2 S2.4 | length 41.9
  Top Layer w0.305: S2.4 79.375,66.421 80.264,67.31 85.598,67.31 89.281,70.993 89.281,75.184 90.551,76.454 102.616,76.454 103.505,77.343 105.537,77.343 106.045,76.835 v1(106.172,76.835)
  Bottom Layer w0.305: DA1.14 R26.2 104.299,80.105 105.283,79.121 105.283,77.47 105.918,76.835 v1(106.172,76.835)
G1: DA1.15 R1.2 S2.3 | length 37.9
  Top Layer w0.305: S2.3 85.979,66.04 91.694,71.755 91.694,74.93 92.583,75.819 104.14,75.819 v1(104.521,76.2)
  Bottom Layer w0.305: DA1.15 R1.2 101.568,79.121 104.14,79.121 104.521,78.74 v1(104.521,76.2)
GND: boot.2 C3.1 C5.2 C7.2 C11.2 C14.1 C16.2 C18.2 C19.2 C24.2 C25.2 C26.1 C28.1 C29.1 C30.1 C31.1 C32.1 C33.1 C34.2 C35.1 C37.1 C38.1 C39.1 C40.1 C41.1 C42.1 C43.1 C44.1 C46.2 CN1.1 CN2.1 DA1.11 DA1.20 Enc1.1 Enc2.1 J1.2 P2.2 P3.2 P4.3 P5.3 P6.2 P7.2 P13.3 P18.2 P20.2 R3.1 R15.2 R16.2 R17.2 R28.1 reset.2 S2.1 S2.2 U1.5 U1.13 U2.1 U3.9 U3.12 U3.24 U3.33 U3.43 U3.57 U3.66 U3.78 U4.4 U4.8 U5.2 U7.9 U8.1 U8.8 usb.4 | length 51.1
  Top Layer w0.305: U3.78 146.475,66.775 ; U3.66 146.9,72.775 ; U3.57 148.55,79.35 C38.1 148.475,80.425 148.675,80.625 ; 151.05,61.953 U3.9 ; U3.12 152.55,62.65 C42.1 ; C39.1 155.55,78.75 U3.43 ; U3.24 161.325,67.275 C41.1 ; U3.33 161.25,71.775 C40.1 ; 160.35,88.475 160.95,87.875 U8.1 ; U8.8 168.95,86.875
  Top Layer w0.4: P7.2 R28.1@70.8,67.8 ; 149.832,88.307 U1.13 ; 154.858,88.942 U1.5
  Top Layer w0.5: C7.2 C5.2 C29.1 C28.1
  Top Layer w0.75: P6.2 71.3,53.725 C5.2
  Bottom Layer w0.5: C33.1 124.325,77.225 C30.1
  Bottom Layer w1.27: 114.681,75.311 114.888,75.518 C25.2
  other v1: 139.075,74.55 146.7,80.625 155.05,92.35
  other v2: 124.95,61.35
Heat: R15.1 U3.73 U7.7 | length 21.1
  Top Layer w0.3: v1(140.985,54.475) U7.7 140.985,61.981 140.175,62.791 140.175,67.4 142.05,69.275 U3.73
  Bottom Layer w0.3: v1(140.985,54.475) 140.985,56.56 R15.1
heat_ctrl_gnd: IC1.4 R18.1 R27.1 U7.12 | length 119
  Top Layer w0.5: IC1.4 62.488,78.613 66.325,82.45 69.625,82.45 R18.1 ; v1(138.8,52.275) 140.985,50.09 U7.12
  Bottom Layer w0.5: IC1.4 62.484,77.597 R27.1 68.148,77.8 73.6,77.8 75.5,75.9 75.5,58.5 77.4,56.6 86.8,56.6 90,53.4 124.7,53.4 127.1,55.8 135.975,55.8 138.8,52.975 v1(138.8,52.275)
Mute: R35.1 U3.71 | length 34.8
  Top Layer w0.3: R35.1 121.489,71.275 124.664,68.1 126.225,68.1 127.525,66.8 127.525,64.325 127.95,63.9 131.85,63.9 133.25,62.5 138.325,62.5 139.265,63.44 139.265,67.763 141.727,70.225 141.775,70.225 141.825,70.275 U3.71
NetC1_1: C1.1 C3.2 L2.2 | length 14
  Top Layer w1.27: 97.028,91.606 97.068,91.566 C3.2
  Top Layer w2.54: L2.2 97.028,91.606 98.845,91.606 C1.1
NetC1_2: C1.2 P2.1 | length 13.3
  Top Layer w1.27: P2.1 90.17,99.441 97.964,99.441 C1.2
NetC2_1: C2.1 DA1.19 L2.1 | length 11.7
  Top Layer w0.508: L2.1@90.297,86.106 90.678,86.487 97.282,86.487 97.917,85.852
  Top Layer w1.27: DA1.19 L2.1@90.424,85.979
NetC2_2: C2.2 DA1.18 | length 4.4
  Top Layer w0.508: DA1.18@92.837,82.55 92.837,82.296 95.377,84.836 C2.2@95.917,84.836
NetC4_1: C4.1 T2.4 | length 28.6
  Top Layer w0.635: v1(95.504,68.326) 95.758,68.326 102.87,61.214 105.156,61.214 106.934,59.436 109.728,59.436 110.49,58.674 110.49,57.023 108.872,55.405 T2.4@103.964,55.405
  Bottom Layer w0.635: v1(95.504,68.326) C4.1
NetC4_2: C4.2 DA1.4 | length 2.3
  Bottom Layer w0.508: C4.2 DA1.4
NetC9_1: C9.1 DA1.5 | length 2.5
  Top Layer w0.305: DA1.5@97.917,73.279 DA1.5@98.044,73.152
  Bottom Layer w0.508: C9.1 DA1.5
NetC9_2: C9.2 T1.4 | length 27.8
  Top Layer w0.508: v1(98.044,68.326) 98.044,68.072 99.06,68.072 101.854,65.278 105.156,65.278 107.188,63.246 109.22,63.246 117.315,55.151 118.95,55.151 T1.4@119.331,55.532
  Bottom Layer w0.635: v1(98.044,68.326) C9.2
NetC10_2: C10.2 DA1.6 | length 2.3
  Bottom Layer w0.508: C10.2 DA1.6
NetC11_1: C11.1 C15.1 L3.2 | length 15.3
  Top Layer w1.27: L3.2@108.077,91.733 L3.2@109.259,91.733 ; 118.403,91.733 118.403,89.329 119.848,87.884 C11.1
  Top Layer w2.54: L3.2 118.403,91.733
NetC12_1: C12.1 DA1.13 | length 4.8
  Top Layer w0.508: C12.1 103.378,84.455 104.267,84.455 106.045,82.677 DA1.13@105.537,82.677
NetC12_2: C12.2 DA1.12 L3.1 | length 12.4
  Top Layer w0.508: C12.2@100.743,85.503 101.727,86.487 107.823,86.487 L3.1@108.077,86.233
  Top Layer w1.27: DA1.12 108.204,84.836 L3.1
NetC14_2: C14.2 DA1.9 | length 2.1
  Bottom Layer w0.508: DA1.9@108.077,73.279 C14.2
NetC15_2: C15.2 P3.1 | length 14
  Top Layer w1.27: P3.1 107.696,98.425 108.712,99.441 117.395,99.441 C15.2
NetC45_1: C45.1 U8.9 | length 5.1
  Top Layer w0.3: C45.1 165.95,84.075 165.95,87.075 166.25,87.375 U8.9
NetC45_2: C45.2 U8.2 | length 5.4
  Top Layer w0.3: U8.2 164.55,87.375 164.95,86.975 164.95,84.075 C45.2
NetC46_1: C46.1 U8.3 | length 2.9
  Top Layer w0.3: C46.1@160.25,86.875 U8.3
NetD3_1: D3.1 IC1.1 P17.1 | length 13.5
  Bottom Layer w1.27: P17.1 58.775,93.7 IC1.1 62.357,97.282 D3.1@67.945,97.282
NetD3_2: D3.2 IC1.2 P19.1 | length 21.8
  Top Layer w1.27: IC1.2 61.499,91.282 D3.2@69.945,91.282
  Top Layer w1.905: P19.1@56.007,81.25 56.007,87.464 59.856,91.313 IC1.2
NetDA1_2: DA1.2 R2.2 | length 2.7
  Bottom Layer w0.305: R2.2 90.424,75.66 DA1.2
NetDA1_3: DA1.3 R35.2 | length 30.7
  Top Layer w0.305: DA1.3@92.837,73.279 92.837,74.422 93.599,75.184 108.966,75.184 109.474,74.676 109.474,72.136 110.109,71.501 118.749,71.501 R35.2
NetIC1_3: IC1.3 R34.1 | length 17.3
  Bottom Layer w0.508: 58.039,80.137 60.452,80.137 IC1.3 63.515,83.2 R34.1
NetP1_1: P1.1 T1.1 | length 31.6
  Top Layer w0.508: P1.1 88.9,59.817 92.583,63.5 94.107,63.5 95.123,64.516 95.123,66.421 93.599,67.945 93.599,69.342 94.107,69.85 98.806,69.85 102.616,66.04 107.696,66.04 T1.1@108.331,65.405
NetP1_2: P1.2 T2.1 | length 6.5
  Top Layer w0.508: P1.2 89.408,62.357 92.456,65.405 T2.1@92.964,65.405
NetP1_3: P1.3 T1.3 T2.3 | length 30.3
  Top Layer w0.635: P1.3 87.376,64.897 85.852,63.373 85.852,58.674 87.121,57.405 92.964,57.405 108.204,57.405 T1.3@108.331,57.532
NetP4_1: P4.1 RL4.11 | length 31.9
  Top Layer w3: RL4.11 102.29,49.975 122.65,49.975 124.365,48.26 P4.1
NetP4_2: P4.2 R3.2 | length 2.4
  Bottom Layer w0.635: P4.2 R3.2
NetP17_2: P17.2 P19.2 | length 12.5
  Top Layer w1.905: P19.2 P17.2
NetR13_2: R13.2 TX.2 | length 21.9
  Top Layer w0.3: TX.2 168.425,96.9 v1(168.525,97)
  Bottom Layer w0.3: R13.2 156.925,90.425 157.2,90.15 160.236,90.15 161.161,89.225 165.764,89.225 167.25,90.711 167.25,95.725 v1(168.525,97)
NetR14_2: R14.2 RX.2 | length 18
  Top Layer w0.3: v1(168.325,91.9) 168.325,93.3 RX.2
  Bottom Layer w0.3: R14.2 155.15,87.85 157,89.7 160.05,89.7 160.975,88.775 165.95,88.775 168.325,91.15 v1(168.325,91.9)
NetR27_2: R27.2 VD4.2 | length 3.1
  Top Layer w0.305: VD4.2@67.31,79.855 69.06,79.855 v1(69.088,79.883)
  Bottom Layer w0.305: R27.2 68.04,79.502 68.421,79.883 v1(69.088,79.883)
NetR28_2: R28.2 VD5.2 | length 2.1
  Top Layer w0.305: R28.2 72.9,67.9 VD5.2
NetRL3_11: RL3.11 usb.1 | length 50.6
  Top Layer w0.5: usb.1 152.225,98 153.325,99.1 170.1,99.1 175.4,93.8 175.4,75.775 172.535,72.91 RL3.11
NetU1_8: U1.8 usb.3 | length 6.2
  Top Layer w0.3: U1.8 156.3,96.475 usb.3
NetU1_9: U1.9 usb.2 | length 7.4
  Top Layer w0.3: U1.9 154.725,94.022 usb.2
reset: R8.1 reset.1 U3.14 | length 21.2
  Top Layer w0.3: U3.14 153.55,62.55 153.875,62.225 154.65,62.225 155.25,61.625 155.25,60.6 154.4,59.75 153.375,59.75 152.075,58.45 152.075,52.675 153.1,51.65 R8.1 156.35,49.2 reset.1
Sharp: P13.1 U3.7 | length 23
  Top Layer w0.3: P13.1 142.075,83.275 142.075,80.3 150.05,72.325 U3.7
Tacho_fan1: CN1.3 R9.1 U3.29 | length 21.8
  Top Layer w0.3: U3.29 162.1,69.775 163.35,68.525 163.35,67.211 163.737,66.824 163.737,63.662 160.775,60.7 CN1.3
  Bottom Layer w0.3: CN1.3 160.775,62.375 R9.1
Tacho_fan2: CN2.3 R11.1 U3.28 | length 26.8
  Top Layer w0.3: CN2.3 154.875,59.4 156.925,61.45 160.725,61.45 163.287,64.013 163.287,66.637 162.9,67.025 162.9,68.3 161.925,69.275 U3.28
  Bottom Layer w0.3: CN2.3 158.575,61.715 R11.1
Term: P5.1 R5.1 U3.59 U3.60 | length 25
  Top Layer w0.3: P5.1 141.825,92 139.6,89.775 139.6,86.425 141.45,84.575 143.8,84.575 144.625,83.75 144.625,80.95 146.99,78.585 ; U3.60 146.99,78.585 ; U3.59 147.55,78.25 147.215,78.585 146.99,78.585
  Bottom Layer w0.3: P5.1 144.9,92 R5.1
usb_pwr: U3.75 U7.2 | length 20.7
  Top Layer w0.3: U3.75 142.364,68.275 141.1,67.011 141.1,63.139 142.939,61.3 142.964,61.3 144.726,59.538 146.813,59.538 147.335,59.015 U7.2 v1(147.335,54.475)
usb_pwr_gnd: RL3.A1 U7.17 | length 30.5
  Top Layer w0.5: U7.17 147.335,46.965 147.875,46.425 168.825,46.425 170.975,48.575 RL3.A1
VBAT: C7.1 P6.1 RL4.14 | length 24.2
  Top Layer w3: P6.1 71.005,48.35 93.175,48.35 RL4.14
pads on no net: RL2.14 RL3.14 RL4.12 T1.2 T1.5 T1.6 T2.2 T2.5 T2.6 U1.15 U1.16 U3.1 U3.2 U3.3 U3.4 U3.5 U3.6 U3.11 U3.13 U3.15 U3.16 U3.17 U3.18 U3.19 U3.20 U3.22 U3.23 U3.25 U3.26 U3.27 U3.30 U3.31 U3.32 U3.35 U3.36 U3.37 U3.38 U3.39 U3.40 U3.44 U3.45 U3.46 U3.47 U3.48 U3.51 U3.52 U3.53 U3.54 U3.55 U3.58 U3.64 U3.65 U3.68 U3.69 U3.70 U7.5 U7.6 U7.13 U7.14 usb.5 usb.6
copper on no net: | length 33.1
  Top Layer w0.3: 146.99,63.04 146.99,63.625 ; v1(150.975,75.825) 151.05,75.9 151.05,77.425
  Bottom Layer w0.2: 161.946,47.404 161.95,47.357 162.004,47.302 162.199,47.295 162.242,47.318 162.274,47.384 162.281,48.133 162.313,48.304 162.348,48.382 162.394,48.484 162.453,48.526 162.613,48.601 162.742,48.628 162.855,48.593 162.956,48.55 163.062,48.499 163.124,48.421 163.167,48.312 163.21,48.172 163.244,47.37 163.252,47.331 163.304,47.252 163.476,47.24 163.516,47.252 163.563,47.351 163.523,48.861 163.489,48.927 163.409,48.943 163.34,48.901 163.314,48.855 163.264,48.81 163.222,48.832 163.143,48.867 163.089,48.897 163.032,48.943 162.789,48.962 162.622,48.962 162.573,48.954 162.256,48.822 162.121,48.691 162.064,48.603 161.977,48.402 161.965,48.273 161.946,48.183 161.946,47.404 ; 163.656,48.175 163.66,48.016 163.682,47.917 163.736,47.75 163.808,47.609 163.888,47.48 163.983,47.397 164.078,47.347 164.234,47.267 164.374,47.256 164.534,47.252 164.617,47.252 164.808,47.309 164.899,47.385 165.036,47.454 165.131,47.488 165.218,47.423 165.343,47.343 165.48,47.264 165.705,47.237 165.929,47.248 166.165,47.34 166.305,47.457 166.438,47.64 166.51,47.784 166.564,47.993 166.571,48.149 166.518,48.377 166.434,48.544 166.389,48.65 166.328,48.726 166.225,48.813 166.115,48.882 165.971,48.946 165.686,48.962 165.522,48.95 165.439,48.908 165.363,48.867 165.29,48.821 165.229,48.76 165.157,48.73 165.062,48.734 164.99,48.772 164.903,48.836 164.804,48.897 164.716,48.946 164.545,48.969 164.427,48.965 164.256,48.95 164.116,48.886 163.99,48.81 163.907,48.749 163.846,48.642 163.732,48.487 163.709,48.403 163.675,48.304 163.656,48.175 ; 163.987,48.152 164.009,48.247 164.063,48.361 164.142,48.487 164.226,48.536 164.374,48.612 164.522,48.612 164.663,48.574 164.773,48.502 164.865,48.422 165.009,48.327 165.096,48.327 165.241,48.361 165.347,48.434 165.477,48.51 165.583,48.559 165.72,48.624 165.906,48.589 166.062,48.494 166.138,48.411 166.225,48.247 166.241,48.137 166.233,48.035 166.199,47.932 166.138,47.799 166.058,47.7 165.959,47.64 165.86,47.587 165.731,47.594 165.591,47.632 165.473,47.7 165.389,47.757 165.267,47.845 165.18,47.879 164.99,47.845 164.88,47.799 164.766,47.716 164.667,47.655 164.564,47.602 164.378,47.59 164.264,47.655 164.173,47.727 164.104,47.784 164.047,47.894 164.006,47.959 163.99,48.058 163.987,48.152 ; 166.68,48.179 166.69,47.359 166.705,47.309 166.752,47.266 166.936,47.266 166.972,47.29 166.991,47.323 167.005,47.371 167.006,48.138 167.015,48.222 167.029,48.267 167.055,48.296 167.109,48.363 167.141,48.409 167.216,48.519 167.33,48.586 167.426,48.62 167.472,48.631 167.53,48.627 167.619,48.612 167.708,48.562 167.773,48.531 167.835,48.492 167.889,48.415 167.932,48.326 167.959,48.245 167.963,48.18 167.974,47.389 167.99,47.335 168.032,47.293 168.24,47.293 168.279,47.339 168.295,47.389 168.298,48.867 168.252,48.942 168.138,48.932 168.08,48.853 167.981,48.827 167.861,48.88 167.813,48.937 167.704,48.942 167.615,48.953 167.406,48.953 167.228,48.947 167.108,48.864 167.034,48.838 166.914,48.728 166.762,48.488 166.68,48.179

## Polygon pours and split planes (outlines as drawn)
GND on Bottom Layer "Top Layer-No Net" (solid, remove dead copper, pour order 7): 83.439,99.949 83.439,59.309 115.824,59.309 115.824,99.949
GND on Bottom Layer "Top Layer-No Net" (solid, remove dead copper, pour order 6): 44,78.74 44,45.339 178.054,45.339 178.054,64.135 178.054,99.06 123.571,99.06 123.571,64.135 92.71,64.135 92.71,78.74
AGND on Bottom Layer "Bot Layer-No Net" (solid, remove dead copper, pour order 4): 94.107,78.359 93.98,78.232 93.98,66.675 106.68,66.675 106.697,66.716 106.68,66.802 106.68,75.946 99.06,75.946 99.06,78.359
GND on Top Layer "Top Layer-No Net" (solid, pour order 9): 178,99 178,45.4 123.6,45.4 123.6,45.5 123.6,46.6 123.6,99

## Keep-outs
Keep-Out Layer:
  lines w0.254: 42.425,44.323 179.197,44.323 179.197,100.711 42.425,100.711 42.425,44.323 ; 58.293,86.614 58.293,88.011 71.247,88.011 71.247,86.614 58.293,86.614

## Other copper
Bottom Layer:
  region: 165.906,48.589 166.062,48.494 166.138,48.411 166.225,48.247 166.241,48.137 166.233,48.035 166.199,47.932 166.138,47.799 166.058,47.7 165.959,47.64 165.86,47.587 165.731,47.594 165.591,47.632 165.473,47.7 165.389,47.757 165.267,47.845 165.18,47.879 164.99,47.845 164.88,47.799 164.766,47.716 164.667,47.655 164.564,47.602 164.378,47.59 164.264,47.655 164.173,47.727 164.104,47.784 164.047,47.894 164.006,47.959 163.99,48.058 163.987,48.152 164.009,48.247 164.063,48.361 164.142,48.487 164.226,48.536 164.374,48.612 164.522,48.612 164.663,48.574 164.773,48.502 164.865,48.422 165.009,48.327 165.096,48.327 165.241,48.361 165.347,48.434 165.477,48.51 165.583,48.559 165.72,48.624
  pour cut-out: 106.934,76.708 106.934,74.803 111.434,74.803 111.594,74.643 111.633,74.682 111.633,76.708
  pour cut-out: 99.264,78.359 99.264,76.15 103.809,76.15 103.886,76.073 104.013,76.2 104.013,78.359
  text "www.noon3d.ru" at 172.085,45.339 h1.02

## Silkscreen, mask and mechanical layers (free items; w line width, h text height)
Top Overlay:
  circle w0.254: c66.675,77.597 r1.047
  lines w0.254: 86.692,44.45 87.073,44.831
  text "Temp" at 145.025,96.8 h2.02 r270
  text "LOUT" at 86.175,95.575 h0.76 r90
  text "ROUT" at 113,95.525 h0.76 r90
  text "220V" at 47.775,89.2 h1.52 r90
  text "tx" at 168.25,88.175 h0.52
  text "Sharp" at 145.2,88 h2.02 r270
  text "rx" at 168.15,85.475 h0.52
  text "Heater" at 47.875,77.35 h1.52 r90
  text "Audio Amp" at 90.17,77.089 h1.52
  text "Fan" at 158.825,62.375 h1.52
  text "LED Out" at 49.85,60.925 h0.76 r90
  text "Int" at 158.95,60.375 h1.52
  text "Ext" at 153.45,60.075 h1.52
  text "+5V" at 65.15,59.275 h1.52 r90
  text "Audio In" at 84.75,59.225 h0.76 r90
  text "BAT" at 123.444,56.134 h1.02 r90
  text "+12V" at 49.875,48.25 h1.52 r90
  text "VBat" at 64.95,48.125 h1.52 r90
Bottom Overlay:
  text "Murinets" at 168.321,53.809 h1.52
  text "murinets.d@ya.ru" at 168.316,51.965 h1.2 r0.43
  text "v1.1, 2017" at 168.316,50.159 h1